# Altium PCB PCB2.PcbDoc
Units mm, origin at the board's own origin, x right, y up, seen from the top; angles counter-clockwise.
Board outline 66.29 x 90.42 mm, 2 copper layers (Top Layer, Bottom Layer); 49 components, 70 nets, 271 pads, 6 vias.
Unrouted connection lines stored in the file: 3.
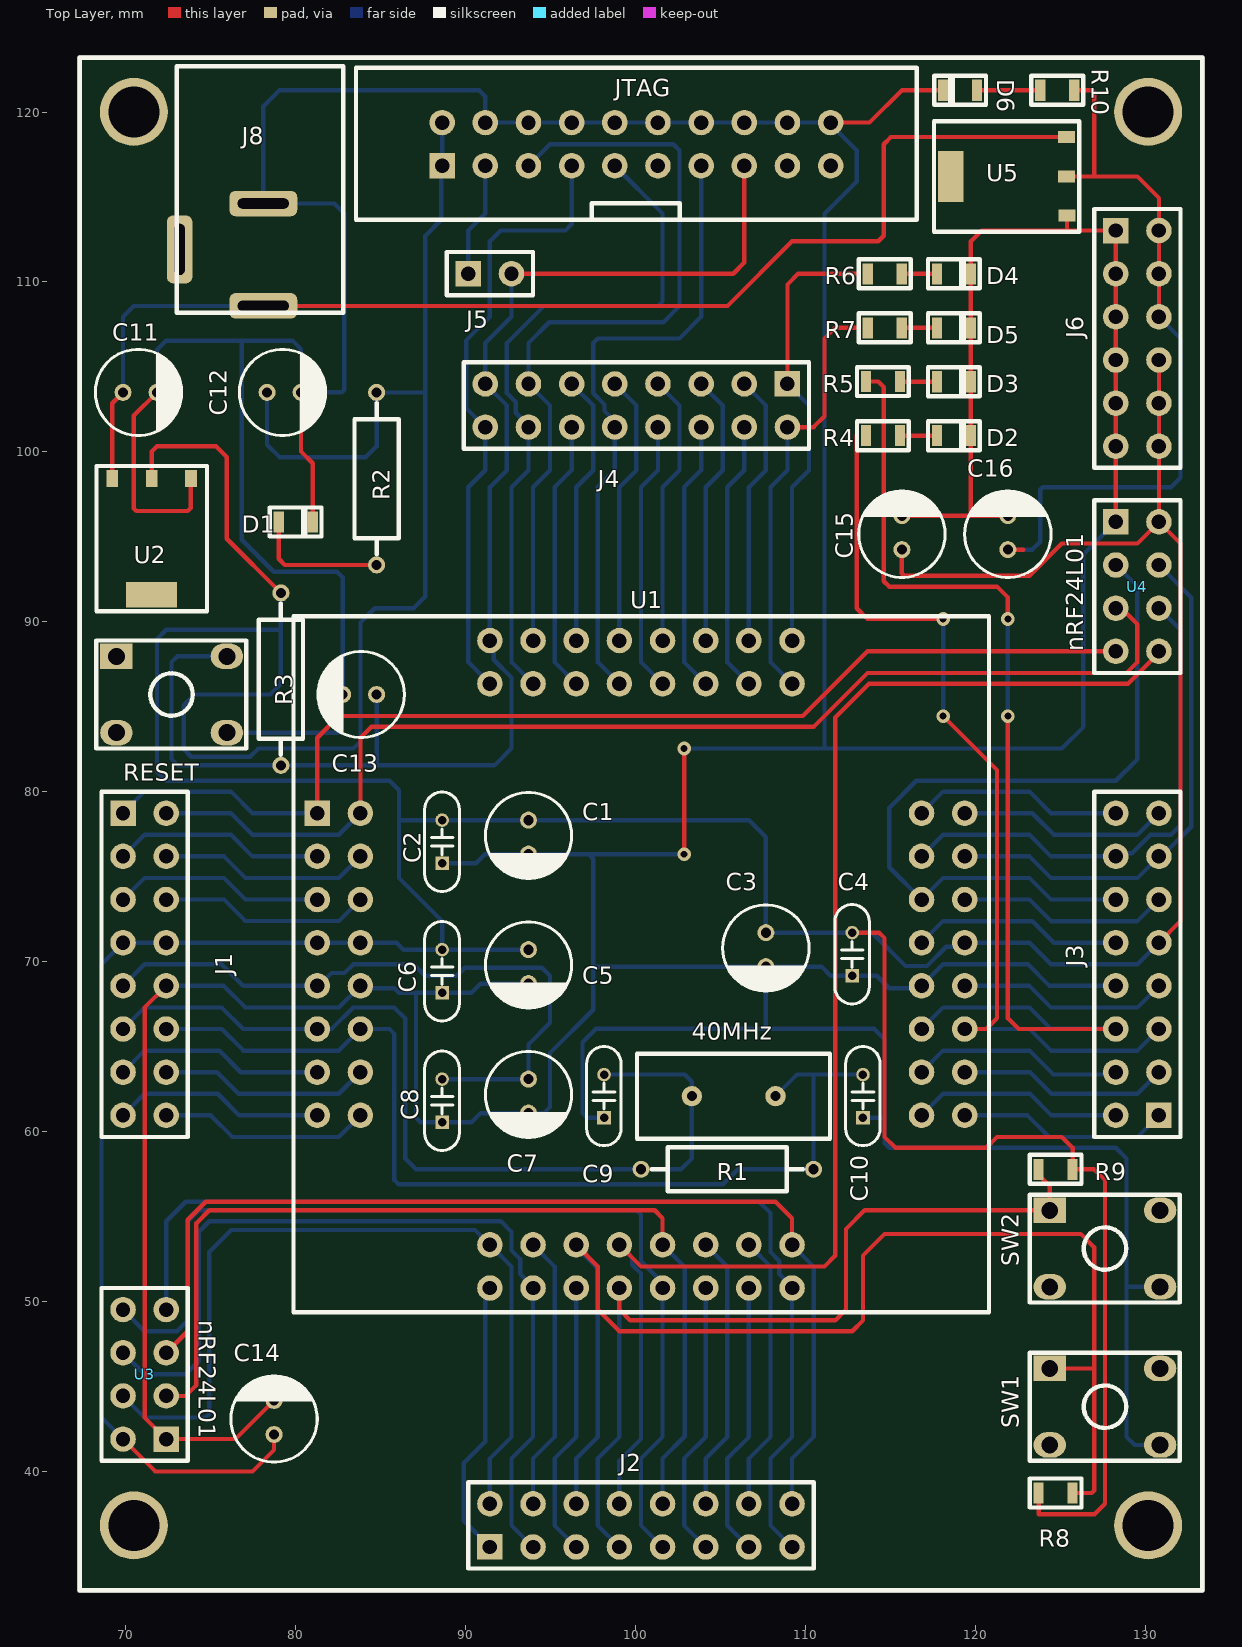
[diagram p0: Top Layer view]
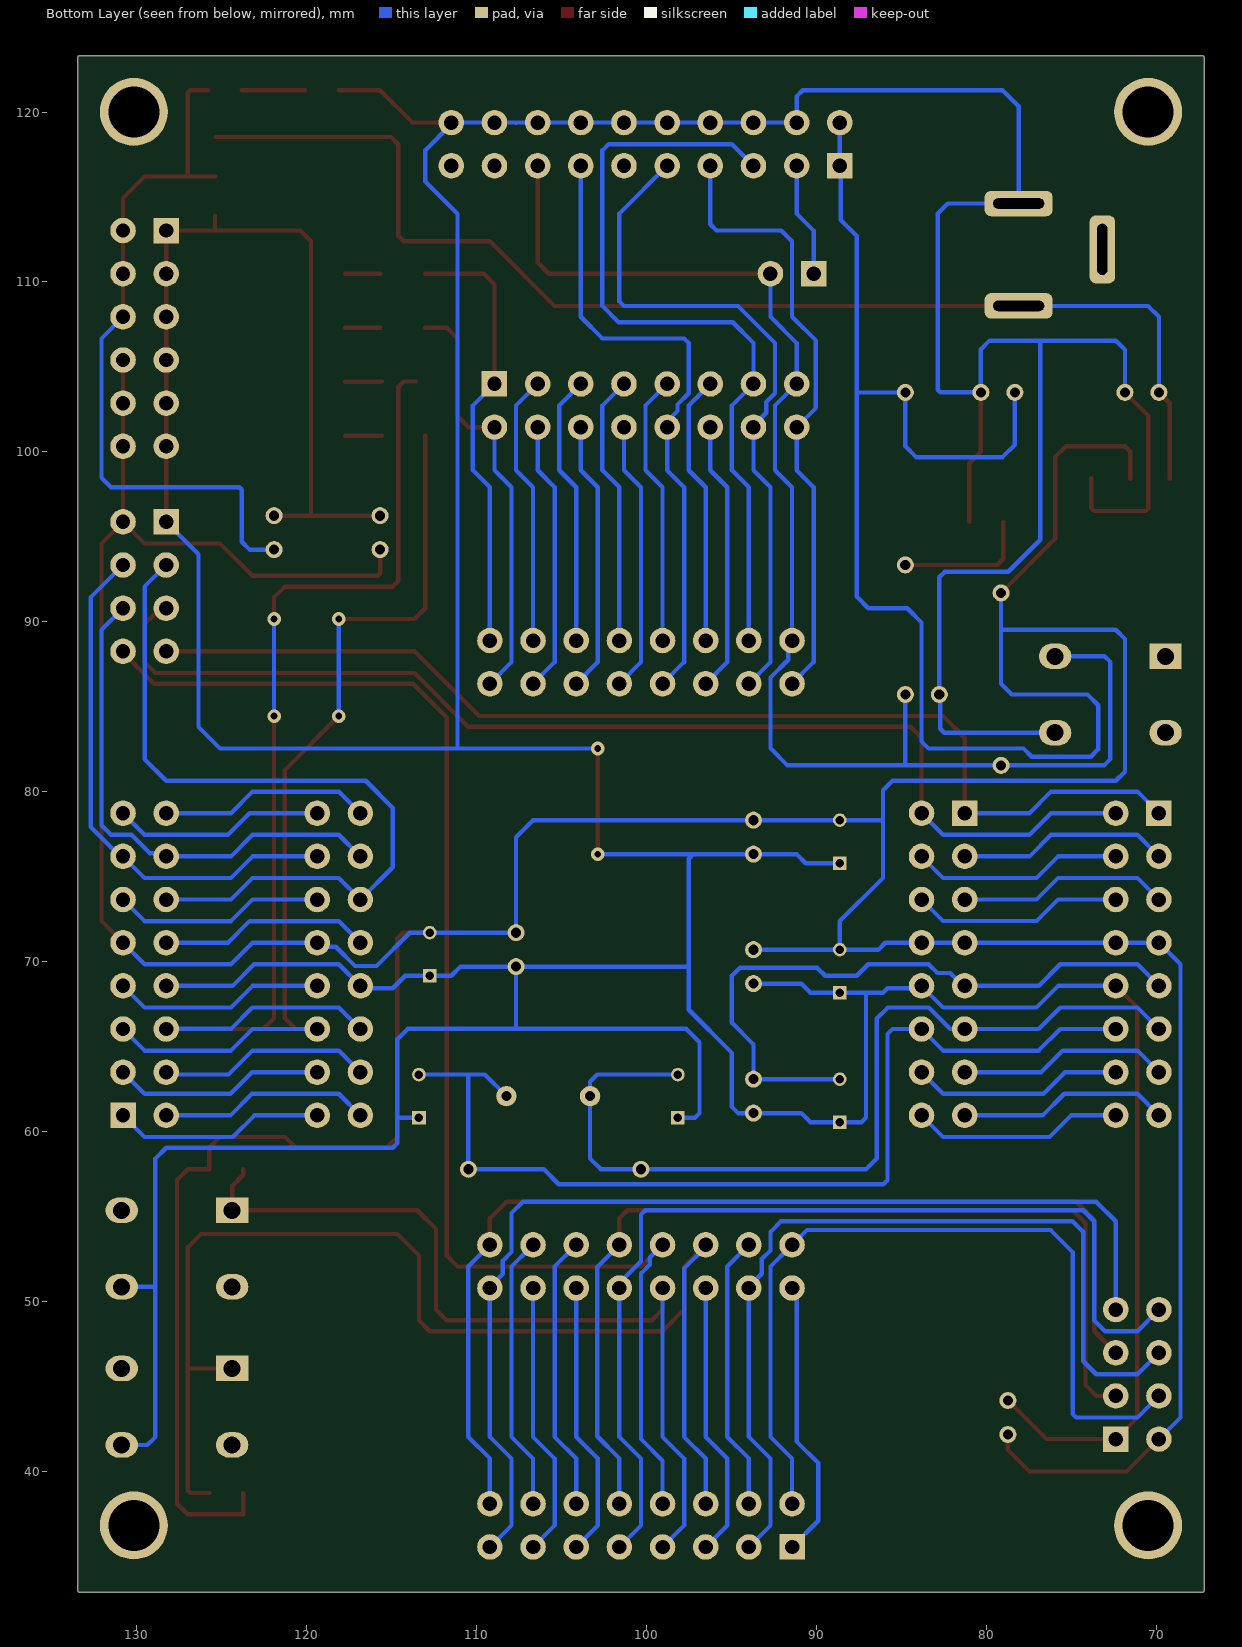
[diagram p1: Bottom Layer view, seen from below]

## Layer stack, top to bottom
Top Solder: solder mask 0.0102, Solder Resist, Dk 3.5
Top Layer: signal copper 0.0356
Dielectric 1: dielectric 0.32, FR-4, Dk 4.8
Bottom Layer: signal copper 0.0356
Bottom Solder: solder mask 0.0102, Solder Resist, Dk 3.5

## Board outline
67.183,33.02 67.183,123.19 cw(c67.31,123.19) 67.31,123.317 cw(c67.31,123.19) 67.31,123.317 133.349,123.317 cw(c133.35,123.19) 133.44,123.28 cw(c133.35,123.19) 133.477,123.19 cw(c133.35,123.19) 133.477,123.189 133.477,119.38 133.477,33.02 cw(c133.35,33.02) 133.35,32.893 67.31,32.893 cw(c67.31,33.02)

## Design rules (kind name [scope] priority, off if disabled: settings)
Clearance [All] p1: gap=0.254 ignorepadtopadclearanceinfootprint=FALSE except(0: Arc-Hole Track-Hole SMDPad-Hole THPad-Hole Via-Hole Fill-Hole Poly-Hole Region-Hole Text-Hole)
PolygonConnect [All] p1: connectstyle=Relief reliefconductorwidth=0.254 reliefentries=4 polygonreliefangle="90 Angle" airgapwidth=0.254
RoutingVias [All] p1: holewidth=0.711 width=1.27 viastyle="Through Hole" minholewidth=0.711 minwidth=1.27 maxholewidth=0.711 maxwidth=1.27
SolderMaskExpansion [All] p1: expansion=0.102
Width [All] p1: maxlimit=0.254 minlimit=0.254 preferedwidth=0.254
30 further rules are at their usual default settings.

## Components (designator, comment, footprint, x,y, rotation, side; value= is the part's Value field where it differs from the comment)
40MHz "40MHz" HC-49_THROUGH 105.775,62.091 r180 top
C1 "100uF" CAP_RAD_4mm 93.71,77.331 r270 top
C2 "100pF" CAP_DISC_PITCH_2.54MM 88.63,77.061 r90 top
C3 "100uF" CAP_RAD_4mm 107.68,70.711 r270 top
C4 "100pF" CAP_DISC_PITCH_2.54MM 112.76,70.441 r90 top
C5 "100uF" CAP_RAD_4mm 93.71,69.711 r270 top
C6 "100pF" CAP_DISC_PITCH_2.54MM 88.63,69.441 r90 top
C7 "100uF" CAP_RAD_4mm 93.71,62.091 r270 top
C8 "100pF" CAP_DISC_PITCH_2.54MM 88.63,61.821 r90 top
C9 "100pF" CAP_DISC_PITCH_2.54MM 98.155,62.091 r90 top
C10 "100pF" CAP_DISC_PITCH_2.54MM 113.395,62.091 r90 top
C11 "100uF" CAP_RAD_4mm 70.85,103.505 r0 top
C12 "100uF" CAP_RAD_4mm 79.327,103.505 r0 top
C13 "100uF" CAP_RAD_4mm 83.773,85.725 r180 top
C14 "100uF" CAP_RAD_4mm 78.74,43.18 r90 top
C15 "100uF" CAP_RAD_4mm 115.685,95.25 r90 top
C16 "100uF" CAP_RAD_4mm 121.92,95.25 r90 top
D1 "LED0805" L0805RED 80.01,95.25 r0 top
D2 "LED0805" L0805RED 118.745,100.33 r0 top
D3 "LED0805" L0805RED 118.745,103.505 r0 top
D4 "LED0805" L0805RED 118.745,109.855 r0 top
D5 "LED0805" L0805RED 118.745,106.68 r0 top
D6 "LED0805" L0805RED 119.11,121.91 r180 top
J1 "Header 8x2 TH Pitch 2.54mm" "Header 8x2 TH Pitch 2.54mm" 71.12,69.85 r0 top
J2 "Header 8x2 TH Pitch 2.54mm" "Header 8x2 TH Pitch 2.54mm" 100.33,36.83 r90 top
J3 "Header 8x2 TH Pitch 2.54mm" "Header 8x2 TH Pitch 2.54mm" 129.54,69.85 r180 top
J4 "Header 8x2 TH Pitch 2.54mm" "Header 8x2 TH Pitch 2.54mm" 100.06,102.731 r270 top
J5 "Header 1x2 TH Pitch 2.54mm" "Header 2x1 TH Pitch 2.54mm" 91.44,110.49 r0 top
J6 "Header 6x2 TH Pitch 2.54mm" "Header 6x2 TH Pitch 2.54mm" 129.54,106.68 r0 top
J8 "Connector" DC_K375A_Power 65.105,115.893 r180 top
JTAG "IDC_2.54_10x2" IDC_CONNECTOR_20_2.54 100.06,118.11 r90 top
R1 "1M" RES-0.25W-H-MF 105.41,57.785 r0 top
R2 "10K" RES-0.25W-H-MF 84.772,98.425 r270 top
R3 "10K" RES-0.25W-H-MF 79.141,86.63 r90 top
R4 "220" R0805 113.57,100.955 r180 top
R5 "220" R0805 113.57,104.14 r180 top
R6 "220" R0805 113.675,110.48 r180 top
R7 "220" R0805 113.675,107.305 r180 top
R8 "220" R0805 123.73,38.735 r180 top
R9 "220" R0805 125.73,57.785 r0 top
R10 "220" R0805 125.825,121.285 r0 top
RESET "Button Hole" BUTTON_HOLE_5.0mm 72.707,85.725 r90 top
SW1 "Button Hole" BUTTON_HOLE_5.0mm 127.635,43.815 r90 top
SW2 "Button Hole" BUTTON_HOLE_5.0mm 127.635,53.122 r90 top
U1 "SOCKET-ENPLAS-OTQ-64-0.5-03" SOCKET-ADAPTER-OTQ-64-05-03 100.695,70.085 r0 top
U2 "AMS1117" SOT223-3 71.54,94.975 r180 top
U3 "nRF24L01" "Header 4x2 TH Pitch 2.54mm" 71.12,45.72 r180 top
U4 "nRF24L01" "Header 4x2 TH Pitch 2.54mm" 129.54,92.075 r0 top
U5 "AMS1117" SOT223-3 121.92,116.205 r90 top

## Footprints (in the part's own frame and the unit in brackets; to place one, negate y for a bottom-side part, rotate by r counter-clockwise, add the part's x,y. Pads: shape width x height; smd on the part's side, far side on the other; paste and mask are expansions set on the pad)
BUTTON_HOLE_5.0mm [mm]
  rect 1.5x1.9 hole 1: 1(2.25,3.25)
  oval 1.5x1.9 hole 1: 2(2.25,-3.25) 3(-2.25,3.25) 4(-2.25,-3.25)
  silkscreen extent -3.18,-4.4 3.18,4.43, body extent -3,-3.86 3,3.86, height 5
CAP_DISC_PITCH_2.54MM [mm]
  rect 0.8x0.8 hole 0.5: 1(-1.27,0)
  round 0.8 hole 0.5: 2(1.27,0)
  silkscreen extent -2.92,-1.01 2.92,1.02, body extent -2.92,-0.85 2.92,0.85, height 5.97
CAP_RAD_4mm [mm]
  round 1 hole 0.6: 1(-1,0) 2(1,0)
  silkscreen extent -2.63,-2.54 2.51,2.54, body extent -2.53,-2.53 2.52,2.53, height 7.29
DC_K375A_Power [mm]
  rrect50% 4x1.5 hole 0.6 slot 3 at 0 deg: 1(-13,7.3) 2(-13,1.275)
  rrect50% 1.5x4 hole 0.6 slot 3 at 90 deg: 3(-8.075,3.975)
  silkscreen extent -17.7,-6.8 -7.9,7.7, body extent -17.7,-6.8 -7.9,7.7, height 11
HC-49_THROUGH [mm]
  round 1.2 hole 0.6: 1(-2.475,0) 2(2.45,0)
  silkscreen extent -5.68,-2.5 5.68,2.5, body extent -5.67,-2.5 5.68,2.5, height 3.68
"Header 2x1 TH Pitch 2.54mm" [mm]
  rect 1.5x1.5 hole 0.85: 1(-1.27,0)
  round 1.5 hole 0.85: 2(1.27,0)
  silkscreen extent -2.54,-1.27 2.54,1.27, body extent -2.54,-1.27 2.54,1.27, height 8.89
"Header 4x2 TH Pitch 2.54mm" [mm]
  rect 1.5x1.5 hole 0.85: 1(-1.27,3.81)
  round 1.5 hole 0.85: 2(1.27,3.81) 3(-1.27,1.27) 4(1.27,1.27) 5(-1.27,-1.27) 6(1.27,-1.27) 7(-1.27,-3.81) 8(1.27,-3.81)
  silkscreen extent -2.54,-5.08 2.54,5.08, body extent -2.54,-5.08 2.54,5.08, height 8.89
"Header 6x2 TH Pitch 2.54mm" [mm]
  rect 1.5x1.5 hole 0.85: 1(-1.27,6.35)
  round 1.5 hole 0.85: 2(1.27,6.35) 3(-1.27,3.81) 4(1.27,3.81) 5(-1.27,1.27) 6(1.27,1.27) 7(-1.27,-1.27) 8(1.27,-1.27) 9(-1.27,-3.81) 10(1.27,-3.81) 11(-1.27,-6.35) 12(1.27,-6.35)
  silkscreen extent -2.54,-7.62 2.54,7.62, body extent -2.54,-7.62 2.54,7.62, height 8.89
"Header 8x2 TH Pitch 2.54mm" [mm]
  rect 1.5x1.5 hole 0.85: 1(-1.27,8.89)
  round 1.5 hole 0.85: 2(1.27,8.89) 3(-1.27,6.35) 4(1.27,6.35) 5(-1.27,3.81) 6(1.27,3.81) 7(-1.27,1.27) 8(1.27,1.27) 9(-1.27,-1.27) 10(1.27,-1.27) 11(-1.27,-3.81) 12(1.27,-3.81) 13(-1.27,-6.35) 14(1.27,-6.35) 15(-1.27,-8.89) 16(1.27,-8.89)
  silkscreen extent -2.54,-10.16 2.54,10.16, body extent -2.54,-10.16 2.54,10.16, height 8.89
IDC_CONNECTOR_20_2.54 [mm]
  rect 1.5x1.5 hole 0.85: 1(-1.27,11.43)
  round 1.5 hole 0.85: 2(1.27,11.43) 3(-1.27,8.89) 4(1.27,8.89) 5(-1.27,6.35) 6(1.27,6.35) 7(-1.27,3.81) 8(1.27,3.81) 9(-1.27,1.27) 10(1.27,1.27) 11(-1.27,-1.27) 12(1.27,-1.27) 13(-1.27,-3.81) 14(1.27,-3.81) 15(-1.27,-6.35) 16(1.27,-6.35) 17(-1.27,-8.89) 18(1.27,-8.89) 19(-1.27,-11.43) 20(1.27,-11.43)
  silkscreen extent -4.45,-16.5 4.5,16.5, body extent -4.47,-16.6 4.42,16.6, height 9
L0805RED [mm]
  rect 0.6x1.24 smd: 1(-1,0.625) 2(1,0.625)
  silkscreen extent -1.53,-0.23 1.52,1.47, body extent -1,0 1,1.25, height 1.1
R0805 [mm]
  rect 0.6x1.24 smd: 1(-2,0) 2(0,0)
  silkscreen extent -2.52,-0.85 0.53,0.85, body extent -2,-0.62 0,0.62, height 0.45
RES-0.25W-H-MF [mm]
  round 1 hole 0.6: 1(-5.075,0) 2(5.075,0)
  silkscreen extent -4.45,-1.3 4.45,1.3, body extent -5.35,-1.3 5.36,1.3, height 2.69
SOCKET-ADAPTER-OTQ-64-05-03 [mm]
  rect 1.5x1.5 hole 0.85: 1(-19.415,8.655)
  round 1.5 hole 0.85: 2(-16.875,8.655) 3(-19.415,6.115) 4(-16.875,6.115) 5(-19.415,3.575) 6(-16.875,3.575) 7(-19.415,1.035) 8(-16.875,1.035) 9(-19.415,-1.505) 10(-16.875,-1.505) 11(-19.415,-4.045) 12(-16.875,-4.045) 13(-19.415,-6.585) 14(-16.875,-6.585) 15(-19.415,-9.125) 16(-16.875,-9.125) 17(-9.255,-19.285) 18(-9.255,-16.745) 19(-6.715,-19.285) 20(-6.715,-16.745) 21(-4.175,-19.285) 22(-4.175,-16.745) 23(-1.635,-19.285) 24(-1.635,-16.745) 25(0.905,-19.285) 26(0.905,-16.745) 27(3.445,-19.285) 28(3.445,-16.745) 29(5.985,-19.285) 30(5.985,-16.745) 31(8.525,-19.285) 32(8.525,-16.745) 33(18.685,-9.125) 34(16.145,-9.125) 35(18.685,-6.585) 36(16.145,-6.585) 37(18.685,-4.045) 38(16.145,-4.045) 39(18.685,-1.505) 40(16.145,-1.505) 41(18.685,1.035) 42(16.145,1.035) 43(18.685,3.575) 44(16.145,3.575) 45(18.685,6.115) 46(16.145,6.115) 47(18.685,8.655) 48(16.145,8.655) 49(8.525,18.815) 50(8.525,16.275) 51(5.985,18.815) 52(5.985,16.275) 53(3.445,18.815) 54(3.445,16.275) 55(0.905,18.815) 56(0.905,16.275) 57(-1.635,18.815) 58(-1.635,16.275) 59(-4.175,18.815) 60(-4.175,16.275) 61(-6.715,18.815) 62(-6.715,16.275) 63(-9.255,18.815) 64(-9.255,16.275)
  silkscreen extent -20.82,-20.71 20.11,20.24, body extent -20.69,-20.55 19.95,20.08, height 9.5
SOT223-3 [mm]
  rect 0.7x1 smd: 1(-2.3,-3.475) 2(0,-3.45) 3(2.325,-3.45)
  rect 3x1.5 smd: 4(0,3.375)
  silkscreen extent -3.25,-4.2 3.25,4.35, body extent -3.25,-3.5 3.25,3.5, height 1.7

## Part data
40MHz: library part Crystal
C1 C3 C5 C7 C11 C12 C13 C14 C15 C16: library part Capacitor(Radian)
C2 C4 C6 C8 C9 C10: library part Capacitors(Disc)
J8: library part JackDC
R1 R2 R3: library part "Resistors THD"
R4 R5 R6 R7 R8 R9 R10: library part "Resistor SMD"
U1: library part S32K118-SOCKET-ENPLAS-OTQ-64-0.5-03
U2 U5: library part AMS1117(SOT-223)
U3 U4: library part "Header 4x2 TH Pitch 2.54mm"

## Free pads (board coordinates)
  round 4 hole 3: 2(70.485,36.83) 3(130.175,36.83) 4(70.485,120.015) 5(130.175,120.015)

## Via types
v1: diameter 0.8, hole 0.4, Top Layer to Bottom Layer, 6 vias

## Nets (pads, with @x,y where several pads share a name; then routed paths per layer and width w, separated by ;. In a path a pad name is that pad's centre, name@x,y a point inside that pad or via, vN(x,y) a via of type N, cw(c..) or ccw(c..) an arc to the next point about the centre after c; other vN are vias at no path point)
+5: C16.1 J6.2 J6.4 J6.6 R10.2 U5.2 | length 43.7
  Top Layer w0.254: C16.1 122.825,94.25 ; U5.2 127,116.205 ; R10.2 126.851,121.285 127,121.136 127,116.205 ; J6.6 J6.2 130.81,114.935 129.54,116.205 127,116.205
  Bottom Layer w0.254: C16.1 123.359,94.25 123.825,94.716 123.825,97.772 123.974,97.921 131.52,97.921 132.08,98.481 132.08,106.68 J6.6
NetC11_1: C11.1 J8.1 U2.3 U5.3 | length 72.9
  Top Layer w0.254: U2.3 69.215,102.87 C11.1 ; J8.1 105.418,108.593 109.22,112.395 114.29,112.395 114.617,112.723 114.617,118.11 115.037,118.53 U5.3
  Bottom Layer w0.254: C11.1 69.85,107.957 70.485,108.593 J8.1
NetD1_1: D1.1 R2.2 | length 8.2
  Top Layer w0.254: D1.1 79.01,93.71 79.37,93.35 R2.2
  Bottom Layer w0.254: R2.2@84.664,93.459 R2.2
NetD2_1: D2.1 R4.1 | length 2.2
  Top Layer w0.254: R4.1@115.57,100.965 115.58,100.955 D2.1
NetD3_1: D3.1 R5.1 | length 2.2
  Top Layer w0.254: R5.1 115.623,104.14 115.675,104.14 115.685,104.13 D3.1
NetD4_1: D4.1 R6.1 | length 2.1
  Top Layer w0.254: R6.1 D4.1
NetD5_1: D5.1 R7.1 | length 2.1
  Top Layer w0.254: R7.1 D5.1
NetD6_1: D6.1 R10.1 | length 3.7
  Top Layer w0.254: D6.1 R10.1
NetJ5_1: J5.1 JTAG.3 | length 6.8
  Bottom Layer w0.254: J5.1 90.17,113.03 91.17,114.03 JTAG.3
PIN1: J1.1 U1.1 U4.7 | length 66
  Top Layer w0.254: U1.1 81.28,83.185 82.55,84.455 109.845,84.455 113.655,88.265 U4.7
  Bottom Layer w0.254: J1.1 71.12,80.01 76.2,80.01 77.47,78.74 U1.1
PIN2: J1.2 U1.2 U4.5 | length 68.4
  Top Layer w0.254: U1.2 83.82,83.185 84.455,83.82 110.49,83.82 113.665,86.995 128.905,86.995 129.54,87.63 129.54,89.864 128.599,90.805 U4.5
  Bottom Layer w0.254: J1.2 76.2,78.74 77.47,77.47 82.55,77.47 U1.2
PIN3: J1.3 U1.3 | length 12.5
  Bottom Layer w0.254: J1.3 71.12,77.47 76.2,77.47 77.47,76.2 U1.3
PIN4: J1.4 U1.4 | length 12.5
  Bottom Layer w0.254: J1.4 75.791,76.2 77.061,74.93 82.55,74.93 U1.4
PIN5: J1.5 U1.5 | length 12.5
  Bottom Layer w0.254: J1.5 71.12,74.93 75.791,74.93 77.061,73.66 U1.5
PIN6: J1.6 U1.6 | length 12.5
  Bottom Layer w0.254: J1.6 75.791,73.66 77.051,72.4 82.56,72.4 U1.6
PIN7: C1.1 C2.2 C3.1 C4.2 C5.1 C6.2 C12.1 C14.1 C15.1 J1.7 J1.8 J3.9 J6.8 J6.10 J6.12 JTAG.1 JTAG.2 R2.1 R3.2 R8.2 R9.2 U1.7 U1.8 U1.41 U2.2 U3.2 U4.2 | length 363.9
  Top Layer w0.254: U3.2 71.755,40.005 77.47,40.005 78.74,41.275 C14.1 ; U2.2 71.54,100.02 71.85,100.33 75.323,100.33 75.958,99.695 75.958,94.888 R3.2 ; C4.2 114.344,71.711 114.665,71.39 114.665,59.69 115.3,59.055 120.65,59.055 121.285,59.69 125.095,59.69 125.73,59.055 R9.2 127,57.785 127.635,57.15 127.635,38.1 127.02,37.485 123.73,37.485 R8.2 ; C15.1 115.675,94.24 115.675,92.859 115.824,92.71 123.19,92.71 125.095,94.615 129.54,94.615 U4.2 ; J3.9 132.08,72.39 132.08,94.615 U4.2 ; J6.12 J6.10 J6.8 ; 130.81,101.6 U4.2
  Bottom Layer w0.254: U3.2 68.58,43.18 68.58,69.85 J1.7 J1.8 78.105,71.12 U1.7 U1.8 85.951,71.12 86.36,70.711 C6.2 ; C12.1 78.327,100.425 79.057,99.695 84.138,99.695 84.772,100.33 R2.1 87.63,103.5 ; R3.2 79.141,89.535 ; JTAG.2 JTAG.1 88.582,116.792 88.582,113.665 87.63,112.713 87.63,103.5 ; C5.1 C6.2 ; U1.41@118.977,70.981 U1.41@119.11,70.981 ; J3.9 129.54,69.85 124.46,69.85 123.19,71.12 U1.41 119.142,70.882 118.292,70.882 117.163,69.753 115.893,69.753 113.935,71.711 C4.2 C3.1 107.68,77.331 106.68,78.331 C1.1 C2.2 86.09,78.331 ; 79.141,89.535 79.141,86.36 78.506,85.725 74.051,85.725 73.416,85.09 73.416,82.512 73.865,82.063 77.329,82.063 77.816,82.55 83.405,82.55 83.82,82.965 83.82,89.961 84.664,90.805 86.951,90.805 87.63,91.484 87.63,103.5 ; 79.141,89.535 72.39,89.535 71.85,88.995 71.85,81.185 72.39,80.645 85.532,80.645 86.09,80.087 86.09,78.331 ; 86.09,78.331 86.09,74.93 88.63,72.39 C6.2
PIN9: C7.1 C8.2 J1.9 U1.9 | length 39.1
  Bottom Layer w0.254: J1.9 71.12,69.85 75.652,69.85 76.922,68.58 U1.9 81.371,68.58 82.126,69.334 82.889,69.334 83.405,69.85 86.951,69.85 87.63,69.171 89.491,69.171 89.965,69.645 94.505,69.645 94.98,69.171 94.98,66.405 93.71,65.135 C7.1 C8.2
PIN10: C1.2 C2.1 C3.2 C4.1 C5.2 C6.1 C7.2 C8.1 C9.1 C10.1 C11.2 C12.2 C13.2 C14.2 C15.2 C16.2 D1.2 D2.2 D3.2 D4.2 D5.2 D6.2 J1.10 J3.8 J6.1 J6.3 J6.5 J6.7 J6.9 J6.11 J8.2 JTAG.4 JTAG.6 JTAG.8 JTAG.10 JTAG.12 JTAG.14 JTAG.16 JTAG.18 JTAG.20 RESET.4 SW1.4 SW2.4 U1.10 U1.40 U2.1 U3.1 U4.1 U5.1 | length 473.5
  Top Layer w0.254: C11.2 70.485,102.14 70.485,96.669 70.634,96.52 73.66,96.52 73.84,96.7 U2.1 ; J1.10 71.12,67.31 71.12,43.18 U3.1 76.47,41.91 C14.2 ; C12.2 80.328,100.02 81.01,99.338 D1.2 ; v1(102.87,76.331) v1(102.87,82.55) ; JTAG.20 113.78,119.38 115.685,121.285 D6.2 ; C15.2 119.745,96.25 ; C16.2 119.745,96.25 ; U5.1 125.395,113.055 125.37,113.03 ; U4.1 128.27,101.6 ; J6.11 J6.1 125.37,113.03 ; 119.745,96.25 D2.2 D3.2 D5.2 D4.2 119.745,112.395 120.38,113.03 125.37,113.03
  Bottom Layer w0.254: C11.2 71.85,106.009 72.39,106.549 76.835,106.549 ; J1.10 75.781,68.58 77.051,67.31 82.55,67.31 U1.10 83.82,68.441 85.82,68.441 86.09,68.171 87.09,68.171 ; RESET.4 82.486,83.475 82.719,83.707 82.719,85.671 C13.2 82.772,92.625 82.446,92.951 78.721,92.951 76.835,94.837 76.835,106.549 ; C2.1 90.63,75.791 91.17,76.331 C1.2 97.25,76.331 ; C5.2 90.9,68.711 90.36,68.171 C6.1 87.09,68.171 ; C9.1 97.155,60.821 96.885,61.091 96.885,65.266 97.669,66.05 107.68,66.05 ; v1(102.87,76.331) 97.25,76.331 ; v1(102.87,82.55) 111.125,82.55 ; C10.1 114.665,60.821 ; U1.40@116.57,68.441 114.935,68.441 114.205,69.171 C4.1 111.49,69.171 110.95,69.711 C3.2 ; U1.40 118.11,69.85 123.102,69.85 124.372,68.58 J3.8 ; U4.1 126.365,93.98 126.365,83.82 125.095,82.55 111.125,82.55 ; SW1.4 129.381,41.565 128.905,42.041 128.905,50.872 ; SW2.4 128.905,50.872 ; 76.835,106.549 79.824,106.549 80.328,106.045 C12.2 82.719,103.505 82.867,103.654 82.867,114.03 82.28,114.617 J8.2 78.105,120.332 79.057,121.285 90.805,121.285 91.17,120.92 JTAG.4 JTAG.6 JTAG.8 JTAG.10 JTAG.12 JTAG.14 JTAG.16 107.68,119.38 JTAG.18 JTAG.20 111.49,119.285 113.03,117.745 113.03,115.915 111.125,114.01 111.125,82.55 ; 87.09,68.171 87.09,60.821 87.36,60.551 C8.1 90.36,60.551 90.9,61.091 C7.2 94.615,61.091 94.98,61.456 94.98,64.631 97.52,67.171 97.52,69.711 ; 97.25,76.331 97.52,76.061 97.52,69.711 ; 97.52,69.711 C3.2 ; 107.68,66.05 114.056,66.05 114.665,65.441 114.665,60.821 ; 107.68,66.05 C3.2 ; 114.665,60.821 114.665,59.325 114.935,59.055 128.27,59.055 128.905,58.42 128.905,50.872
PIN11: 40MHz.2 C9.2 J1.11 R1.1 U1.11 | length 54
  Bottom Layer w0.254: J1.11 71.12,67.31 75.652,67.31 76.922,66.04 U1.11 82.125,66.04 83.395,67.31 85.802,67.31 86.455,66.657 86.455,58.42 87.09,57.785 R1.1 102.69,57.785 103.325,58.42 40MHz.2 103.325,62.942 102.906,63.361 C9.2
PIN12: 40MHz.1 C10.2 J1.12 R1.2 U1.12 | length 59.6
  Bottom Layer w0.254: J1.12 75.661,66.04 76.931,64.77 82.55,64.77 U1.12 85.532,66.04 85.82,65.752 85.82,57.15 86.066,56.904 105.164,56.904 106.045,57.785 R1.2 110.485,63.356 110.49,63.361 ; 40MHz.1 109.52,63.361 110.49,63.361 ; C10.2 110.49,63.361
PIN13: J1.13 U1.13 | length 12.5
  Bottom Layer w0.254: J1.13 71.12,64.77 75.513,64.77 76.783,63.5 U1.13
PIN14: J1.14 U1.14 | length 12.5
  Bottom Layer w0.254: J1.14 75.374,63.5 76.644,62.23 82.55,62.23 U1.14
PIN15: J1.15 U1.15 | length 12.5
  Bottom Layer w0.254: J1.15 71.12,62.23 75.426,62.23 76.696,60.96 U1.15
PIN16: J1.16 U1.16 | length 12.5
  Bottom Layer w0.254: J1.16 75.017,60.96 76.287,59.69 82.55,59.69 U1.16
PIN17: J2.1 U1.17 | length 16.3
  Bottom Layer w0.254: U1.17@91.17,50.661 91.17,41.771 89.9,40.501 89.9,37.1 J2.1
PIN18: J2.2 U1.18 U3.4 | length 49.1
  Bottom Layer w0.254: U3.4 71.12,43.18 74.72,43.18 74.93,43.39 74.93,52.924 76.223,54.217 90.563,54.217 U1.18 ; J2.2@91.17,37.961 91.44,38.231 91.44,40.771 92.71,42.041 92.71,52.07 91.579,53.201 U1.18@91.44,53.201
PIN19: J2.3 U1.19 U3.6 | length 51.9
  Bottom Layer w0.254: U3.6 71.12,45.72 73.533,45.72 74.307,46.494 74.307,54.102 74.93,54.725 92.087,54.725 92.71,54.102 92.71,53.011 93.218,52.503 93.218,51.638 93.98,50.876 U1.19 ; U1.19@93.71,50.661 93.98,50.391 93.98,42.041 92.71,40.771 92.71,36.83 J2.3
PIN20: J2.4 U1.20 | length 16.8
  Bottom Layer w0.254: J2.4@93.71,37.961 93.98,38.231 93.98,40.771 95.25,42.041 95.25,52.07 94.119,53.201 U1.20@93.71,53.201
PIN21: J2.5 U1.21 | length 16.3
  Bottom Layer w0.254: U1.21@96.25,50.661 96.52,50.391 96.52,42.041 95.25,40.771 95.25,36.83 J2.5
PIN22: J2.6 R8.1 SW1.1 U1.22 | length 73.9
  Top Layer w0.254: U1.22 97.79,52.07 97.79,49.53 99.06,48.26 112.76,48.26 113.395,48.895 113.395,52.705 114.665,53.975 126.216,53.975 127,53.191 127,46.065 ; SW1.1 127,46.065 ; R8.1 126.851,38.735 127,38.884 127,46.065
  Bottom Layer w0.254: J2.6@96.25,37.961 96.52,38.231 96.52,40.771 97.79,42.041 97.79,51.949 96.538,53.201 U1.22@96.25,53.201
PIN23: J2.7 R9.1 SW2.1 U1.23 | length 51.3
  Top Layer w0.254: U1.23 99.06,49.53 99.695,48.895 111.76,48.895 112.395,49.53 112.395,54.275 113.492,55.372 SW2.1 124.385,56.81 123.73,57.465 R9.1
  Bottom Layer w0.254: U1.23@98.79,50.661 99.06,50.391 99.06,42.041 97.79,40.771 97.79,36.83 J2.7
PIN24: J2.8 U1.24 U4.8 | length 82.6
  Top Layer w0.254: U1.24 100.33,52.07 111.125,52.07 111.76,52.705 111.76,84.372 113.748,86.36 128.988,86.36 130.81,88.182 U4.8
  Bottom Layer w0.254: J2.8@98.79,37.961 99.06,38.231 99.06,40.64 100.33,41.91 100.33,51.661 99.822,52.169 99.822,52.578 99.199,53.201 U1.24@98.79,53.201
PIN25: J2.9 U1.25 U3.8 | length 58.6
  Bottom Layer w0.254: U3.8 71.12,48.26 73.025,48.26 73.66,48.895 73.66,54.725 74.307,55.372 100.076,55.372 100.33,55.118 100.33,52.379 101.6,51.109 U1.25 ; U1.25@101.33,50.661 101.6,50.391 101.6,42.041 100.33,40.771 100.33,36.83 J2.9
PIN26: J2.10 U1.26 U3.3 | length 57.9
  Top Layer w0.254: U3.3 73.533,44.45 74.168,45.085 74.168,54.61 74.93,55.372 101.138,55.372 101.6,54.91 U1.26
  Bottom Layer w0.254: J2.10@101.33,37.961 101.6,38.231 101.6,40.771 102.906,42.077 102.906,52.034 101.739,53.201 U1.26@101.33,53.201
PIN27: J2.11 U1.27 | length 16.3
  Bottom Layer w0.254: U1.27@103.87,50.661 104.14,50.391 104.14,42.041 102.87,40.771 102.87,36.83 J2.11
PIN28: J2.12 U1.28 | length 16.8
  Bottom Layer w0.254: J2.12@103.87,37.961 104.14,38.231 104.14,40.771 105.41,42.041 105.41,52.07 104.279,53.201 U1.28@103.87,53.201
PIN29: J2.13 U1.29 | length 16.3
  Bottom Layer w0.254: U1.29@106.41,50.661 106.68,50.391 106.68,42.041 105.41,40.771 105.41,36.83 J2.13
PIN30: J2.14 U1.30 | length 16.8
  Bottom Layer w0.254: J2.14@106.41,37.961 106.68,38.231 106.68,40.771 107.95,42.041 107.95,52.07 106.819,53.201 U1.30@106.41,53.201
PIN31: J2.15 U1.31 U3.7 | length 62.7
  Bottom Layer w0.254: U3.7 72.39,54.725 73.545,55.88 107.281,55.88 107.95,55.211 107.95,52.915 108.458,52.407 108.458,51.638 109.22,50.876 U1.31 ; U1.31@108.95,50.661 109.22,50.391 109.22,42.041 107.95,40.771 107.95,36.83 J2.15
PIN32: J2.16 U1.32 U3.5 | length 62.9
  Top Layer w0.254: U3.5 73.66,48.26 73.66,54.82 74.72,55.88 108.25,55.88 109.22,54.91 U1.32
  Bottom Layer w0.254: J2.16@108.95,37.961 109.22,38.231 109.22,40.771 110.49,42.041 110.49,52.07 U1.32
PIN33: J3.1 U1.33 | length 12.5
  Bottom Layer w0.254: U1.33 123.08,60.96 124.35,59.69 129.54,59.69 J3.1
PIN34: J3.2 U1.34 | length 12.5
  Bottom Layer w0.254: U1.34 118.11,62.23 123.219,62.23 124.489,60.96 J3.2
PIN35: J3.3 U1.35 | length 12.5
  Bottom Layer w0.254: U1.35 123.219,63.5 124.489,62.23 129.54,62.23 J3.3
PIN36: J3.4 U1.36 | length 12.6
  Bottom Layer w0.254: U1.36 118.11,64.77 123.19,64.77 124.599,63.361 128.131,63.361 J3.4
PIN37: J3.5 R4.2 U1.37 | length 55
  Top Layer w0.254: 113.03,100.965 113.03,90.805 113.665,90.17 v1(118.11,90.17) ; v1(118.11,84.455) 121.285,81.28 121.285,66.675 120.65,66.04 U1.37
  Bottom Layer w0.254: v1(118.11,84.455) v1(118.11,90.17) ; U1.37 123.19,66.04 124.46,64.77 129.54,64.77 J3.5
PIN38: J3.6 R5.2 U1.38 | length 64.2
  Top Layer w0.254: R5.2 114.29,104.14 114.617,103.812 114.617,92.392 114.935,92.075 121.285,92.075 121.92,91.44 v1(121.92,90.17) ; v1(121.92,84.455) 121.92,66.675 122.555,66.04 J3.6
  Bottom Layer w0.254: U1.38 118.11,67.31 123.199,67.31 124.46,66.05 128.26,66.05 J3.6 ; v1(121.92,84.455) v1(121.92,90.17)
PIN39: J3.7 U1.39 | length 12.5
  Bottom Layer w0.254: U1.39 123.19,68.58 124.46,67.31 129.54,67.31 J3.7
PIN42: J3.10 U1.42 | length 12.5
  Bottom Layer w0.254: U1.42 118.11,72.39 123.359,72.39 124.629,71.12 J3.10
PIN43: J3.11 U1.43 | length 12.5
  Bottom Layer w0.254: U1.43 123.19,73.66 124.46,72.39 129.54,72.39 J3.11
PIN44: J3.12 U1.44 U4.3 | length 46.4
  Bottom Layer w0.254: J3.12 124.46,73.66 123.19,74.93 118.11,74.93 U1.44 114.935,75.565 114.935,79.052 116.528,80.645 128.27,80.645 129.54,81.915 129.54,92.075 U4.3
PIN45: J3.13 U1.45 U4.4 | length 31.3
  Bottom Layer w0.254: U1.45 123.19,76.2 124.46,74.93 129.54,74.93 J3.13 130.968,76.2 132.715,77.947 132.715,91.44 U4.4
PIN46: J3.14 U1.46 U4.6 | length 30.4
  Bottom Layer w0.254: U1.46 118.11,77.47 123.19,77.47 124.46,76.2 J3.14 128.46,76.39 129.235,76.39 130.314,77.47 131.52,77.47 132.08,78.03 132.08,89.535 U4.6
PIN47: J3.15 U1.47 | length 12.5
  Bottom Layer w0.254: U1.47 123.359,78.74 124.629,77.47 129.54,77.47 J3.15
PIN48: J3.16 U1.48 | length 12.5
  Bottom Layer w0.254: U1.48 118.11,80.01 123.19,80.01 124.46,78.74 J3.16
PIN49: J4.1 R6.2 U1.49 | length 26.5
  Top Layer w0.254: J4.1 108.95,109.855 109.575,110.48 113.03,110.48
  Bottom Layer w0.254: U1.49@108.95,88.761 109.22,89.031 109.22,97.921 110.22,98.921 110.22,102.731 J4.1
PIN50: J4.2 R7.2 U1.50 | length 25.2
  Top Layer w0.254: J4.2 110.49,101.461 111.125,102.096 111.125,106.68 111.75,107.305 113.03,107.305
  Bottom Layer w0.254: J4.2 108.95,98.921 107.95,97.921 107.95,87.63 U1.50
PIN51: J4.3 U1.51 | length 16.3
  Bottom Layer w0.254: U1.51@106.41,88.761 106.68,89.031 106.68,97.921 107.68,98.921 107.68,102.731 J4.3
PIN52: J4.4 U1.52 | length 16
  Bottom Layer w0.254: J4.4 106.41,98.921 105.41,97.921 105.41,87.63 U1.52
PIN53: J4.5 U1.53 | length 16.3
  Bottom Layer w0.254: U1.53@103.87,88.761 104.14,89.031 104.14,97.921 105.14,98.921 105.14,102.731 J4.5
PIN54: J4.6 U1.54 | length 16
  Bottom Layer w0.254: J4.6 103.87,98.921 102.87,97.921 102.87,87.63 U1.54
PIN55: J4.7 U1.55 | length 16.3
  Bottom Layer w0.254: U1.55@101.33,88.761 101.6,89.031 101.6,97.921 102.6,98.921 102.6,102.731 J4.7
PIN56: J4.8 U1.56 | length 16
  Bottom Layer w0.254: J4.8 101.33,98.921 100.33,97.921 100.33,87.63 U1.56
PIN57: J4.9 U1.57 | length 16.3
  Bottom Layer w0.254: U1.57@98.79,88.761 99.06,89.031 99.06,97.921 100.06,98.921 100.06,102.731 J4.9
PIN58: J4.10 JTAG.13 U1.58 | length 37.4
  Bottom Layer w0.254: U1.58 97.79,87.63 97.79,97.921 98.79,98.921 J4.10 98.79,101.798 98.181,102.407 98.181,102.789 97.52,103.449 97.52,106.41 97.79,106.68 102.6,106.68 103.87,107.95 JTAG.13
PIN59: J4.11 U1.59 | length 16.3
  Bottom Layer w0.254: U1.59@96.25,88.761 96.52,89.031 96.52,97.921 97.52,98.921 97.52,102.731 J4.11
PIN60: J4.12 U1.60 | length 16
  Bottom Layer w0.254: J4.12 96.25,98.921 95.25,97.921 95.25,87.63 U1.60
PIN61: J4.13 JTAG.5 U1.61 | length 47.2
  Bottom Layer w0.254: U1.61@93.71,88.761 93.98,89.031 93.98,97.921 94.98,98.921 94.98,102.731 J4.13 93.71,106.41 94.932,107.632 101.647,107.632 102.6,108.585 102.6,117.745 102.235,118.11 94.98,118.11 JTAG.5
PIN62: J4.14 JTAG.9 U1.62 | length 40.8
  Bottom Layer w0.254: U1.62 92.71,87.63 92.71,97.921 93.71,98.921 J4.14 93.71,101.552 92.956,102.306 92.956,102.933 92.44,103.449 92.44,106.41 94.615,108.585 101.33,108.585 101.6,108.855 101.6,114.03 JTAG.9
PIN63: C13.1 J4.15 J5.2 JTAG.15 R3.1 RESET.2 U1.63 | length 83.8
  Top Layer w0.254: J5.2 105.755,110.49 106.41,111.145 JTAG.15
  Bottom Layer w0.254: RESET.2 73.052,87.975 72.707,87.63 72.707,81.925 73.077,81.555 R3.1 84.772,81.555 ; C13.1 84.772,81.555 ; U1.63@91.17,88.761 91.44,89.031 91.44,97.921 92.44,98.921 92.44,102.731 J4.15 91.17,106.41 92.71,107.95 J5.2 ; U1.63 91.666,88.674 91.666,87.769 92.71,86.725 92.71,82.56 91.705,81.555 84.772,81.555
PIN64: J4.16 JTAG.7 U1.64 | length 36.7
  Bottom Layer w0.254: U1.64 90.17,87.63 90.17,97.921 91.17,98.921 J4.16 90.039,102.592 90.039,106.549 91.44,107.95 91.44,112.395 92.075,113.03 95.885,113.03 96.25,113.395 JTAG.7
pads on no net: J8.3 JTAG.11 JTAG.17 JTAG.19 RESET.1 RESET.3 SW1.2 SW1.3 SW2.2 SW2.3 U2.4 U5.4

## Silkscreen, mask and mechanical layers (free items; w line width, h text height)
Top Overlay:
  lines w0.254: 67.31,33.02 67.31,123.19 133.35,123.19 133.35,119.38 133.35,33.02 67.31,33.02